# Altium PCB MJE13001_SMPS_5V_1A.PcbDoc
Units mil, origin at the board's own origin, x right, y up, seen from the top; angles counter-clockwise.
Board outline 2250 x 1600 mil, 2 copper layers (Top Layer, Bottom Layer); 25 components, 16 nets, 58 pads, 0 vias.
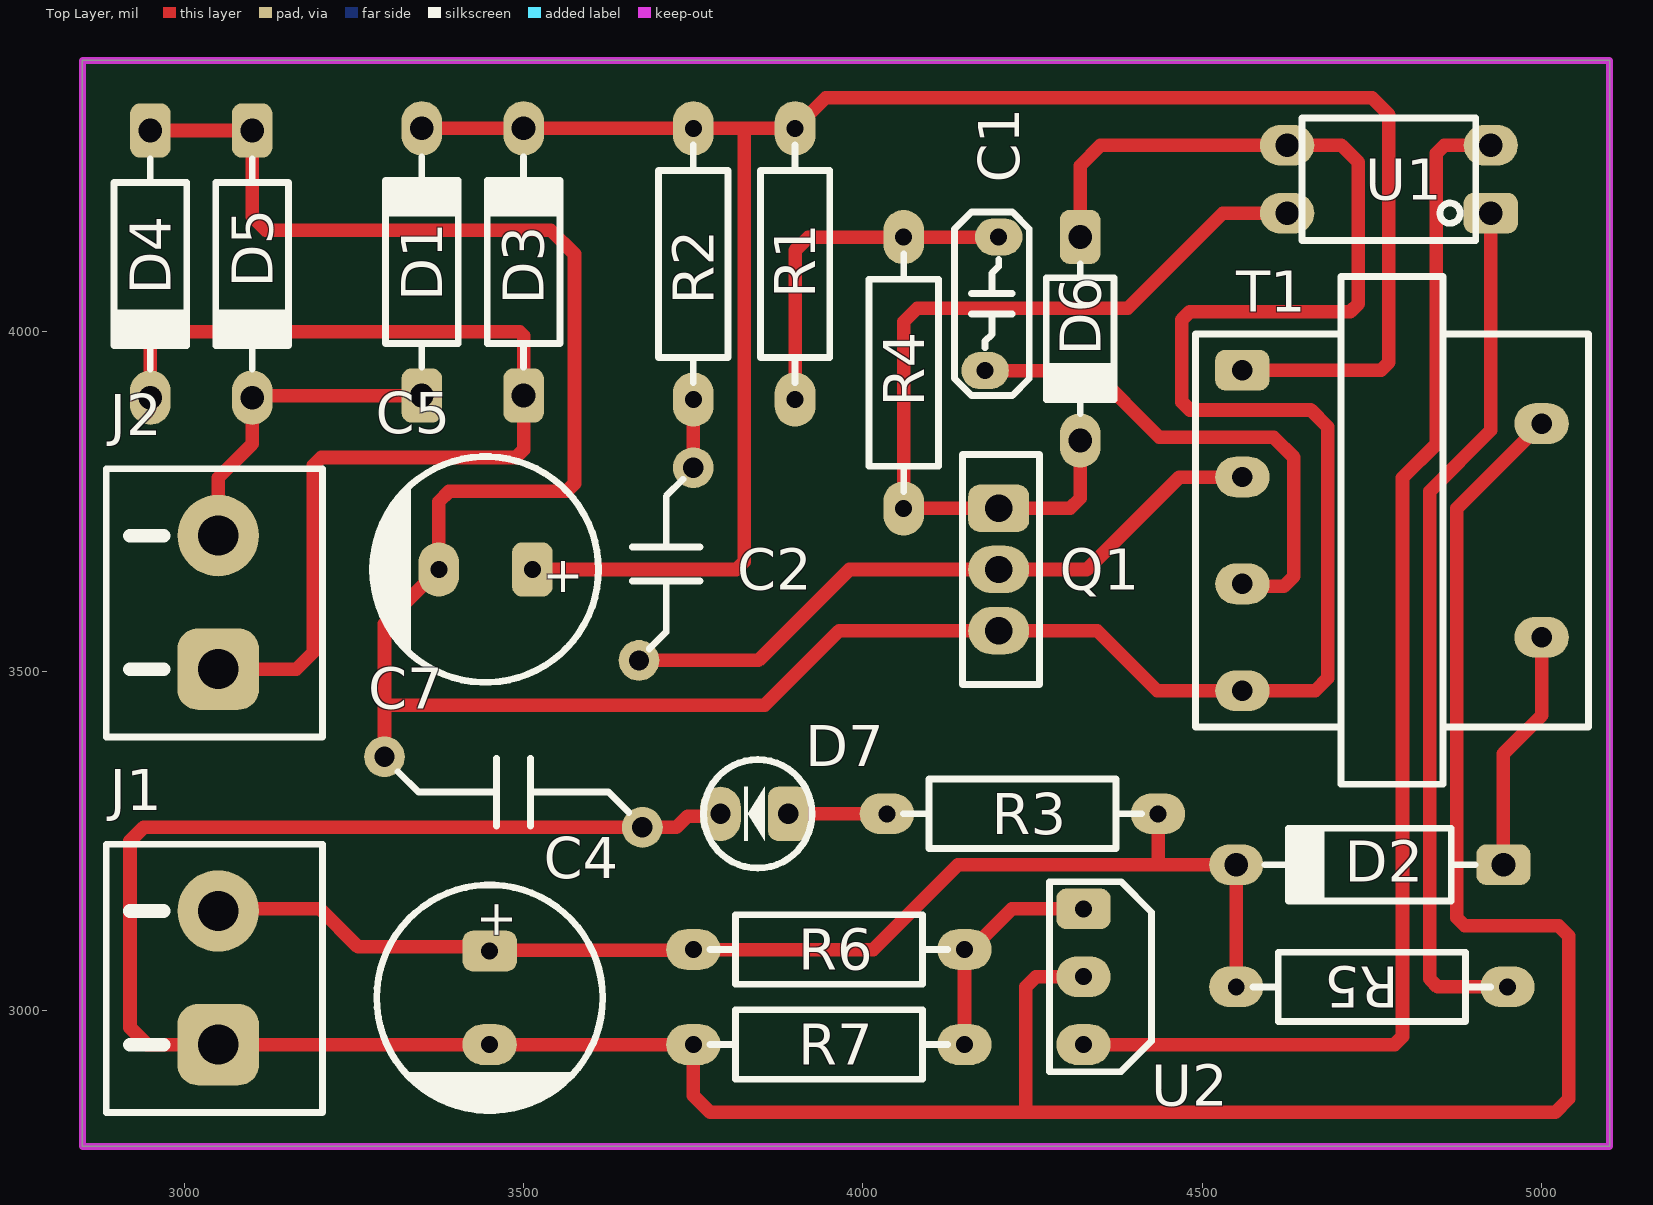
[diagram p0: Top Layer view]
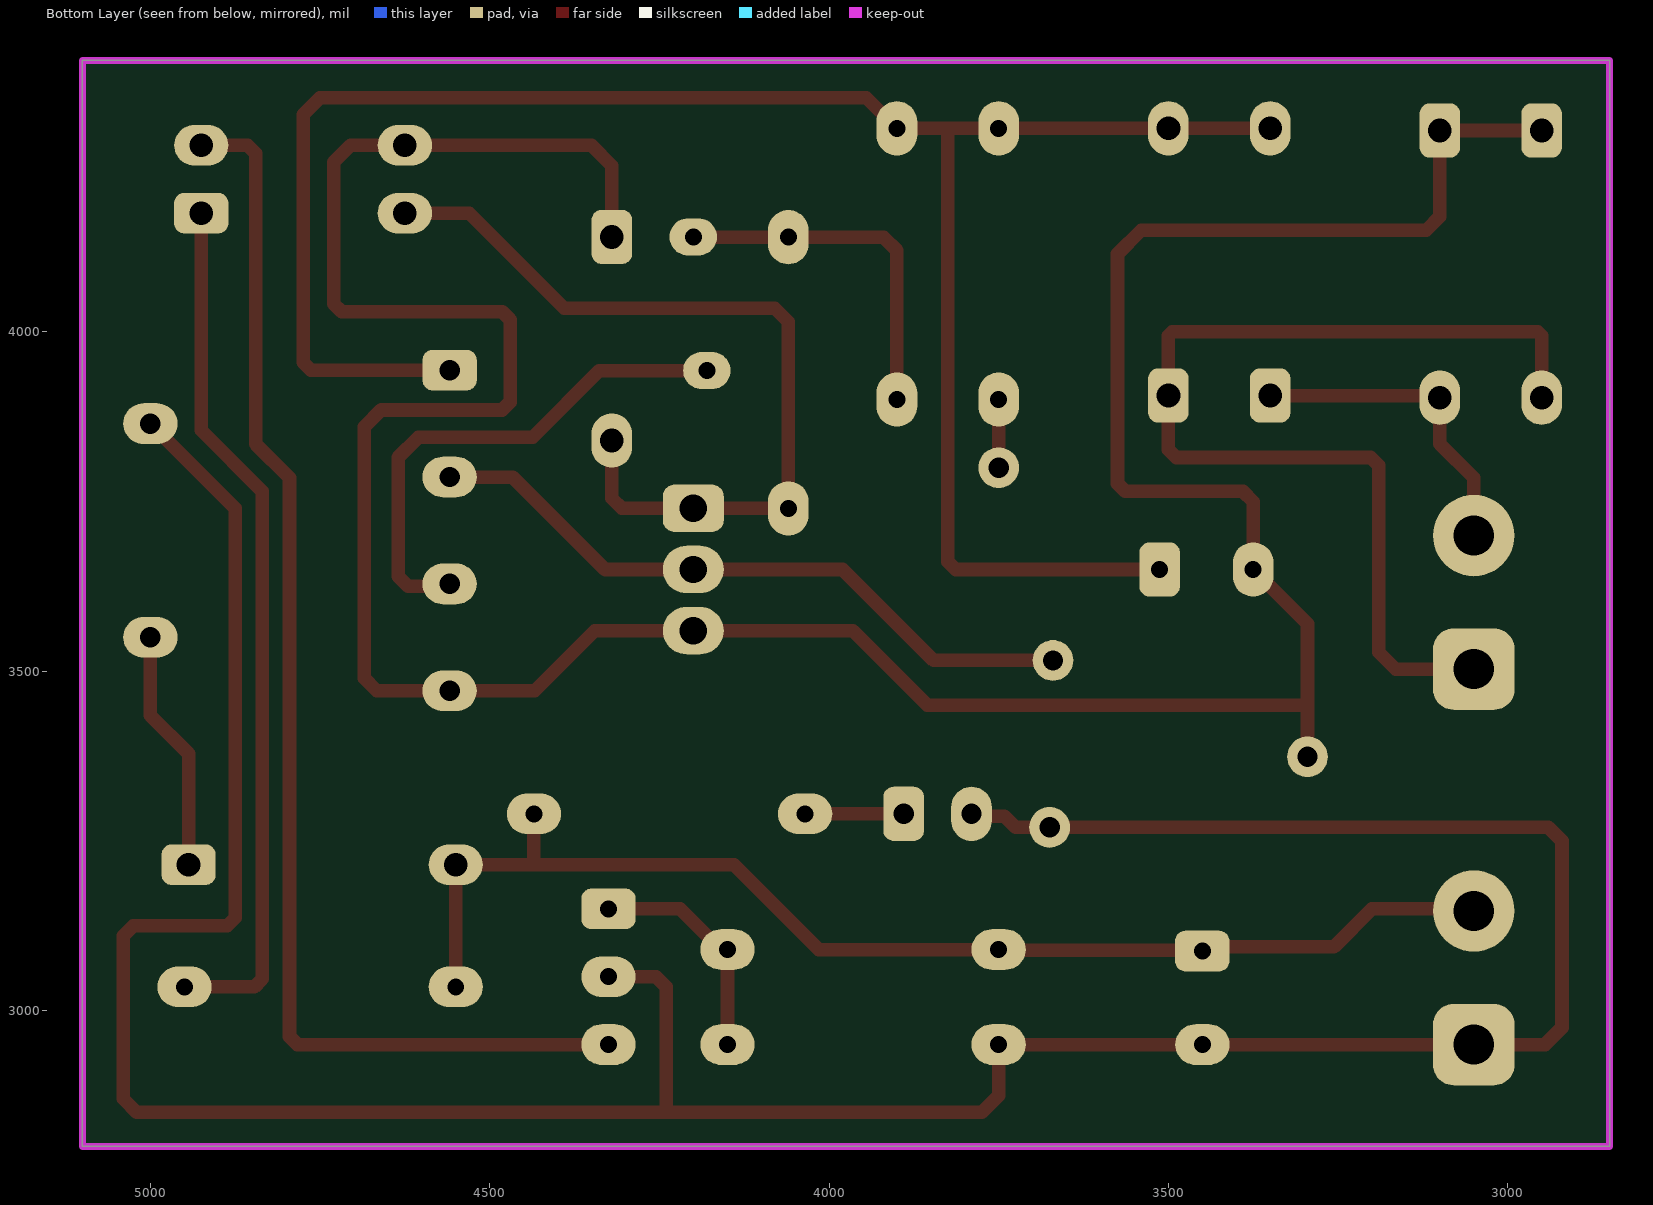
[diagram p1: Bottom Layer view, seen from below]
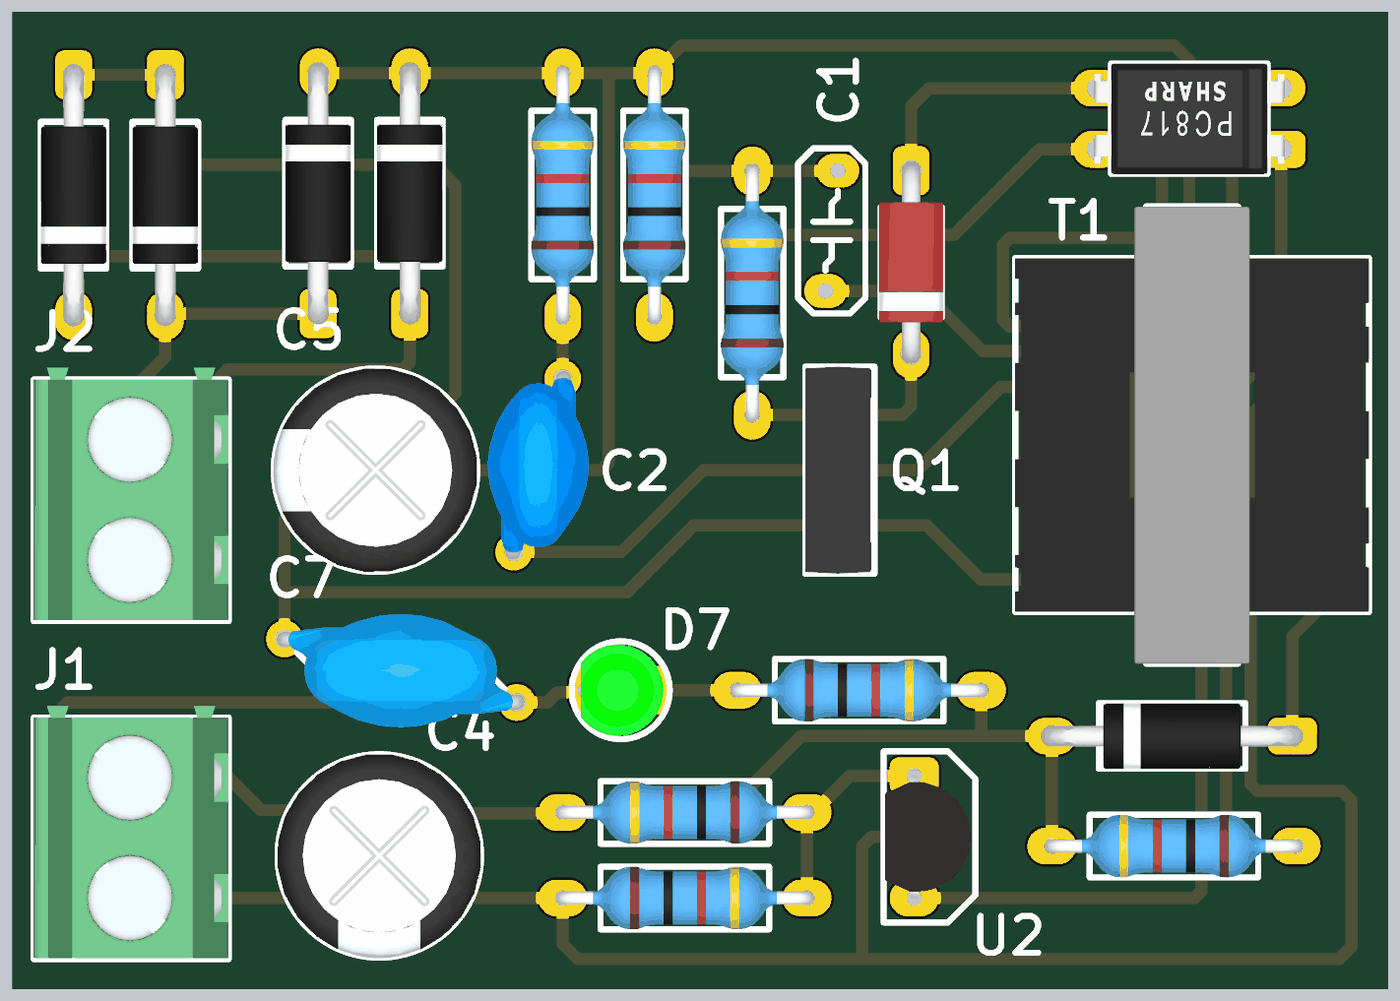
[diagram p2: 3D render of the assembled board from above, using the file's embedded part models]

## Layer stack, top to bottom
Top Solder: solder mask 0.4, Solder Resist, Dk 3.5
Top Layer: signal copper 1.4
Dielectric 1: dielectric 12.6, FR-4, Dk 4.8
Bottom Layer: signal copper 1.4
Bottom Solder: solder mask 0.4, Solder Resist, Dk 3.5

## Board outline
2850,2800 2850,4400 5100,4400 5100,2800

## Design rules (kind name [scope] priority, off if disabled: settings)
Clearance [All] p1: gap=10 ignorepadtopadclearanceinfootprint=FALSE except(0: Arc-Hole Track-Hole SMDPad-Hole THPad-Hole Via-Hole Fill-Hole Poly-Hole Region-Hole Text-Hole)
PolygonConnect [All] p1: connectstyle=Relief reliefconductorwidth=10 reliefentries=4 polygonreliefangle="90 Angle" airgapwidth=10
RoutingVias [All] p1: holewidth=28 width=50 viastyle="Through Hole" minholewidth=28 minwidth=50 maxholewidth=28 maxwidth=50
SolderMaskExpansion [All] p1: expansion=4 istentingtop=FALSE
Width [All] p1: maxlimit=30 minlimit=10 preferedwidth=10
30 further rules are at their usual default settings.

## Components (designator, comment, footprint, x,y, rotation, side; value= is the part's Value field where it differs from the comment)
C1 "471" CAP_DISC_104 4190,4041.57 r270 top
C2 "2kV/471" CAP_DISC_Y1222 3710,3658 r90 top
C4 "1000uF" CAP_RAD_D8x11.5_POL_BK 3450,3018.9 r270 top
C5 "4.7uF/400V" CAP_RAD_D8x11.5_POL_BK 3443.9,3650 r180 top
C7 "222M" CAP_DISC_Y2222 3485,3322 r0 top
D1 "1N4007" DO-41 3350,4103.15 r90 top
D2 "1N4937" DO-41 4746.85,3215 r180 top
D3 "1N4007" DO-41 3500,4103.15 r90 top
D4 "1N4007" DO-41 2950,4100 r270 top
D5 "1N4007" DO-41 3100,4100 r270 top
D6 "1N4148" "DO-35 Horizontal" 4320,3990 r270 top
D7 "LED" LED_3MM_GREEN 3845,3290 r180 top
J1 "DEGSON Screws" DG127-5.0-02P-14-00AH 3050,2950 r90 top
J2 "DEGSON Screws" DG127-5.0-02P-14-00AH 3050,3503.15 r90 top
Q1 "MJE13003" TO-126 4200,3650 r270 top
R1 "1M" RES-0.25W-H-MF 3900.01,4100.2 r90 top
R2 "10K" RES-0.25W-H-MF 3750.01,4100.2 r90 top
R3 "470R" RES-0.25W-H-MF 4235,3290 r0 top
R4 "470R" RES-0.25W-H-MF 4060,3939.8 r90 top
R5 "39R" RES-0.25W-H-MF 4749.8,3035.01 r180 top
R6 "10K" RES-0.25W-H-MF 3949.8,3090.01 r180 top
R7 "10K" RES-0.25W-H-MF 3949.8,2950 r0 top
T1 "EE19-VERTICAL(4+2)" TRANSFORMER-EE19(4+2) 4779.53,3707.48 r0 top
U1 "PC817" PC817-DIP 4775,4225 r180 top
U2 "TL431" TO-92 4325,3050 r270 top

## Footprints (in the part's own frame and the unit in brackets; to place one, negate y for a bottom-side part, rotate by r counter-clockwise, add the part's x,y. Pads: shape width x height; smd on the part's side, far side on the other; paste and mask are expansions set on the pad)
CAP_DISC_104 [mil]
  oval 55x70 hole 25: 1(-98.43,10) 2(98.43,-10)
  silkscreen extent -135,-55 135,55, body extent -118,-40 118,39, height 318
CAP_DISC_Y1222 [mil]
  round 60 hole 30: 1(-142,40) 2(142,-40)
  silkscreen extent -125,-50 125,50, body extent -154,-83 154,83, height 319
CAP_DISC_Y2222 [mil]
  round 60 hole 30: 1(-190,52) 2(190,-52)
  silkscreen extent -170,-50 170,50, body extent -202,-93 202,93, height 354
CAP_RAD_D8x11.5_POL_BK [mil]
  rrect50% 60x80 hole 25: 1(-68.9,0)
  oval 60x80 hole 25: 2(68.9,0)
  silkscreen extent -166,-166 170,166, body extent -167,-167 167,167, height 512
DG127-5.0-02P-14-00AH [mil]
  rrect50% 120x120 hole 59.06: 1(0,0)
  round 120 hole 59.06: 2(196.85,0)
  silkscreen extent -100,-154 295,165, body extent -98,-154 315,165, height 398
"DO-35 Horizontal" [mil]
  rrect50% 80x60 hole 35: 1(-150,0)
  oval 80x60 hole 35: 2(150,0)
  silkscreen extent -110,-50 110,50, body extent -165,-52 166,53, height 112
DO-41 [mil]
  rrect50% 80x60 hole 35: 1(-196.85,0)
  oval 80x60 hole 35: 2(196.85,0)
  silkscreen extent -155,-54 155,54, body extent -214,-54 214,54, height 132
LED_3MM_GREEN [mil]
  rrect50% 60x80 hole 30: 1(-45,0)
  oval 60x80 hole 30: 2(55,0)
  silkscreen extent -80,-80 80,80, body extent -70,-75 65,75, height 223
PC817-DIP [mil]
  rrect50% 80x60 hole 35: 1(-150,50)
  oval 80x60 hole 35: 2(-150,-50) 3(150,-50) 4(150,50)
  silkscreen extent -128,-90 128,90, body extent -155,-90 155,90, height 169
RES-0.25W-H-MF [mil]
  oval 80x60 hole 25: 1(-199.8,0) 2(199.8,0.01)
  silkscreen extent -175,-51 175,51, body extent -211,-51 211,51, height 106
TO-92 [mil]
  rrect50% 60x80 hole 25: 1(-100,0)
  oval 60x80 hole 25: 2(0,0) 3(100,0)
  silkscreen extent -140,-50 140,100, body extent -109,-48 109,93, height 298
TO-126 [mil]
  rrect50% 70x90 hole 40: 1(-90.16,0)
  oval 70x90 hole 40: 2(0,0) 3(90.16,0)
  silkscreen extent -169,-53 169,60, body extent -169,-53 169,55, height 622
TRANSFORMER-EE19(4+2) [mil]
  rrect50% 80x60 hole 30: 1(-220.47,236.22)
  oval 80x60 hole 30: 2(-220.47,78.74) 3(-220.47,-78.74) 4(-220.47,-236.22) 5(220.47,157.48) 6(220.47,-157.48)
  silkscreen extent -289,-374 289,374, body extent -289,-374 289,374, height 665

## Part data
C1 C2 C7: library part Capacitors(Disc)
C4 C5: library part Capacitor(Radian)
D1 D3 D4 D5: library part Diode-1N4007
D2: library part Diode-1N4937
D6: library part Diode-1N4148
D7: library part "LED 3MM"
J1 J2: library part DG127-5.0-02P-14-00AH
Q1: library part Transistor-MJE13003
R1 R2 R3 R4 R5 R6 R7: library part "Resistors THD"
T1: library part TRANS-EE19-VERTICAL(4+2)
U1: library part Opto-PC817
U2: library part Ic-TL431

## Nets (pads, with @x,y where several pads share a name; then routed paths per layer and width w, separated by ;. In a path a pad name is that pad's centre, name@x,y a point inside that pad or via, vN(x,y) a via of type N, cw(c..) or ccw(c..) an arc to the next point about the centre after c; other vN are vias at no path point)
GND: C4.2 C7.2 D7.2 J1.1 R7.1 T1.5 U2.2 | length 4851.8
  Top Layer w20: C4.2@3443.9,2950 J1.1 2945,2950 2920,2975 2920,3250 2940,3270 3725,3270 3741.72,3286.72 3786.72,3286.72 D7.2 ; C4.2 R7.1 3750,2875 3775,2850 4240,2850 ; U2.2 4255,3050 4240,3035 4240,2850 ; T1.5 4875,3739.96 4875,3136.72 4886.72,3125 5025,3125 5040,3110 5040,2870 5020,2850 4240,2850
NetC1_1: C1.1 R1.1 R4.2 | length 527.9
  Top Layer w20: R1.1 3900.01,4120.01 3919.61,4139.61 R4.2 4060.19,4139.8 4199.8,4139.8 C1.1
NetC1_2: C1.2 T1.3 | length 766.8
  Top Layer w20: C1.2 4338.57,3943.15 4436.72,3845 4605,3845 4635,3815 4635,3640 4620,3625 4562.8,3625 T1.3
NetC2_1: C2.1 Q1.2 T1.2 | length 1001
  Top Layer w20: C2.1 3846,3516 3980,3650 Q1.2 4330,3650 4466.22,3786.22 T1.2
NetC2_2: C2.2 R2.1 | length 100.4
  Top Layer w20: C2.2 R2.1
NetC4_1: C4.1 D2.2 J1.2 R3.2 R5.2 R6.2 | length 1839
  Top Layer w20: J1.2@3050,3150 3200,3150 3256.1,3093.9 3450,3093.9 C4.1 3451.1,3088.9 3748.9,3088.9 R6.2 4015,3090 4140,3215 4430,3215 ; R3.2 4434.8,3219.8 4430,3215 ; R5.2 D2.2 4430,3215
NetC5_1: C5.1 D1.2 D3.2 R1.2 R2.2 T1.1 | length 2994.7
  Top Layer w20: D1.2 D3.2 R2.2 3825,4300 ; C5.1 3813.28,3650 3825,3661.72 3825,4300 ; T1.1 4763.28,3943.7 4775,3955.42 4775,4320 4750,4345 3945,4345 R1.2 3825,4300
NetC5_2: C5.2 C7.1 D4.1 D5.1 D6.1 Q1.3 T1.4 U1.3 | length 4950.6
  Top Layer w20: D4.1 D5.1 3100,4170 3120,4150 3540,4150 3575,4115 3575,3776.72 3563.28,3765 3390,3765 3375,3750 C5.2 3295,3570 3295,3450 ; C7.1 3295,3450 ; D6.1 4320,4245 4350,4275 U1.3 4705,4275 4730,4250 4730,4041.72 4718.28,4030 4481.72,4030 4470,4018.28 4470,3896.72 4481.72,3885 4660,3885 4685,3860 4685,3490 4666.26,3471.26 T1.4 4433.74,3471.26 4345.16,3559.84 Q1.3 3964.84,3559.84 3855,3450 3295,3450
NetD1_1: D1.1 D5.2 J2.2 | length 475.2
  Top Layer w20: J2.2 3050,3785 3100,3835 D5.2 3103.15,3906.3 D1.1
NetD2_1: D2.1 T1.6 | length 358.3
  Top Layer w20: D2.1 4943.7,3378.7 5000,3435 T1.6
NetD3_1: D3.1 D4.2 J2.1 | length 1558.5
  Top Layer w20: D4.2 2950,3994.14 2955.86,4000 3494.14,4000 3500,3994.14 3500,3826.72 3488.28,3815 3201.72,3815 3190,3803.28 3190,3528.15 3165,3503.15 J2.1
NetD6_2: D6.2 Q1.1 R4.1 U1.4 | length 1257.5
  Top Layer w20: D6.2 4320,3755 4305.16,3740.16 Q1.1 4199.92,3740.08 4060.08,3740.08 R4.1 4060,4015 4080,4035 4390,4035 4530,4175 U1.4
NetD7_1: D7.1 R3.1 | length 145.2
  Top Layer w20: D7.1 R3.1
NetR5_1: R5.1 U1.1 | length 1285
  Top Layer w20: U1.1 4925,3855 4835,3765 4835,3046.72 4846.72,3035.01 R5.1
NetR6_1: R6.1 R7.2 U2.1 | length 340.5
  Top Layer w20: R6.1@4149.41,3100.01 R6.1@4149.51,3099.91 ; R7.2@4149.51,2950.11 R7.2 R6.1 4159.61,3090.01 4219.6,3150 U2.1
NetU1_2: U1.2 U2.3 | length 1892.8
  Top Layer w20: U2.3 4783.28,2950 4795,2961.72 4795,3785 4845,3835 4845,4263.28 4856.72,4275 U1.2 U1.2@4917.35,4267.35

## Keep-outs
Keep-Out Layer:
  the board outline again, w10

## Text inside footprints (layer, text, board x,y; h text height)
C4: Top Overlay "+" at 3420,3163.9 h90 r270
C5: Top Overlay "+" at 3588.9,3680 h90 r180